# EAGLE board Shield_v1 (EAGLE 7.6.0)
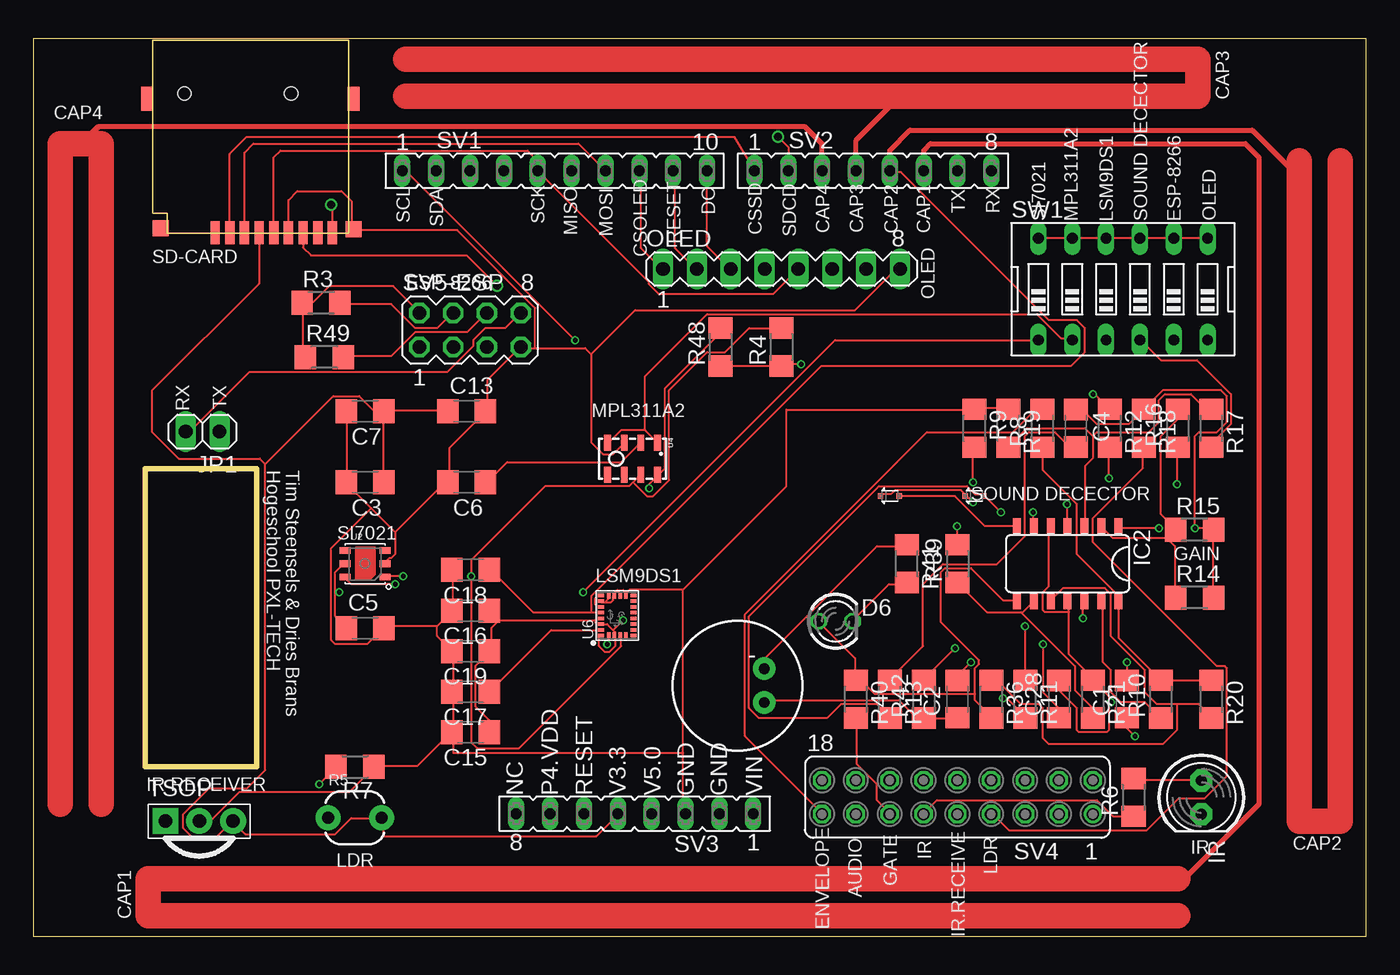
[diagram p0: board, top side]
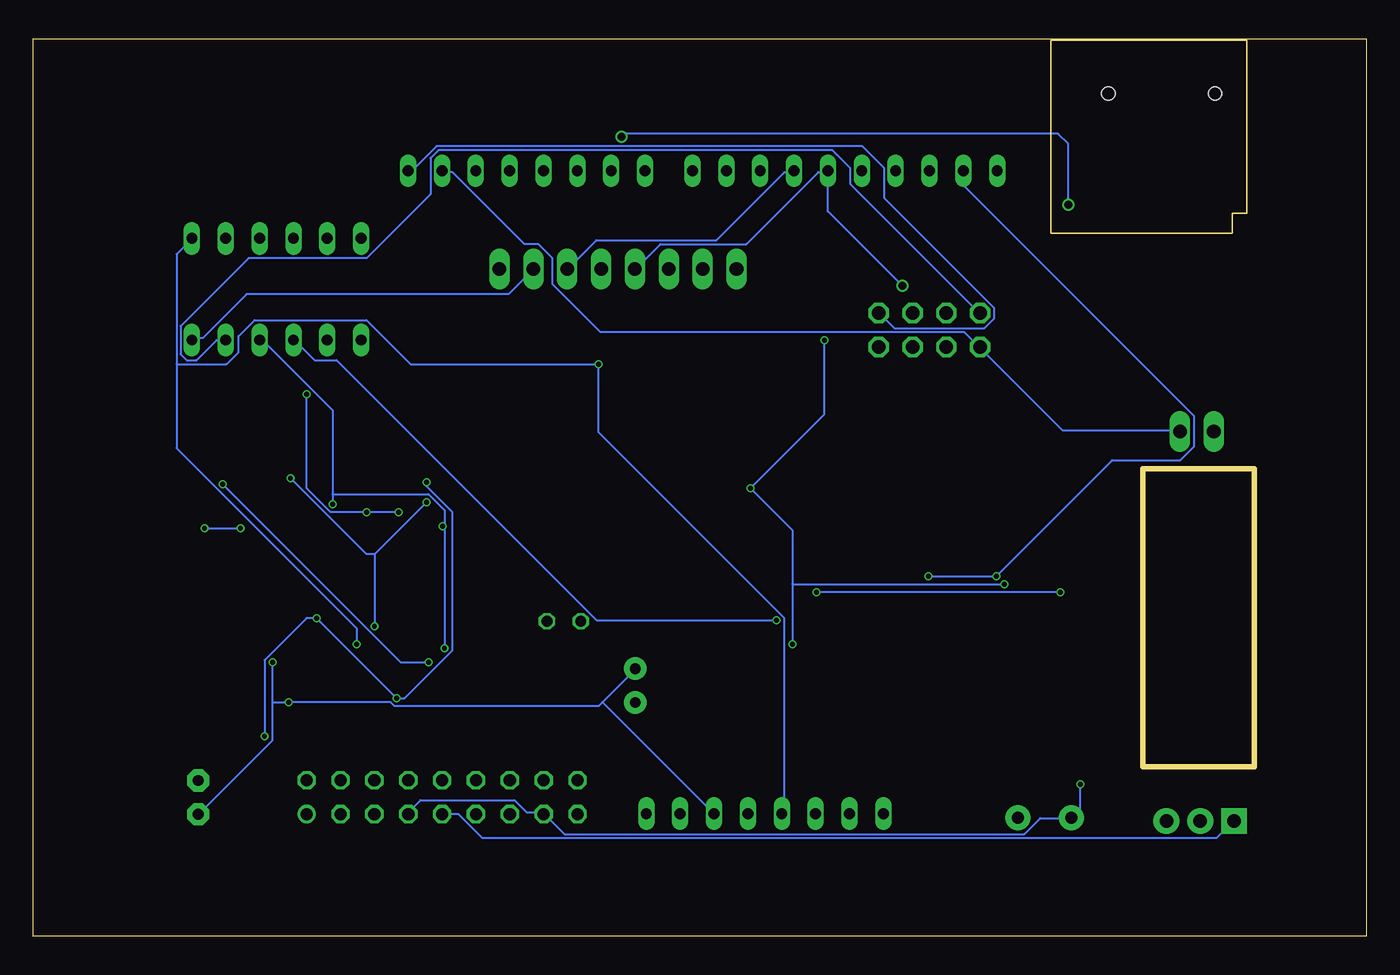
[diagram p1: board, bottom side, seen from below]

Size 100 x 67.3 mm. Coordinates in mm from the lower left corner, seen from the top.
Outline: 0,0 100,0 100,67.3 0,67.3 0,0
Outline: 8.38,35.05 8.38,12.7 16.76,12.7 16.76,35.05 8.38,35.05
Copper layers (1*16): Top 0.018mm / dielectric 1.55mm / Bottom 0.018mm
Design rules "eC_2Layer_PClass6_BaseCopperO18_eCDefault": minimum track width 0.15mm, minimum drill 0.35mm, track to track 0.15mm, track to pad 0.15mm, pad to pad 0.15mm, via to via 0.15mm, smd to smd 0mil, copper to edge 0.25mm, drill to drill 0.35mm, minimum pad ring 0.175mm, minimum via ring 0.125mm, stop-mask expansion 0mil, vias tented up to drill 0.45mm, thermal gap 0.2mm
Net classes: 0 default: clearance 0.205 mm
Holes 1 mm at 11.34,63.21 19.34,63.22

## Footprints (pad centres in the part's own frame; a part is rotated, then mirrored left to right if it is on the bottom)
C1206 = smd 1.6 x 1.8: 1 -1.4,0; 2 1.4,0
SOD-523 = smd 0.4 x 0.4: A -0.7,0; C 0.7,0
LED3MM = drill 0.813 octagon: A -1.27,0; K 1.27,0
SO014 = smd 0.6 x 1.2: 1 -3.175,-2.8; 2 -1.905,-2.8; 3 -0.635,-2.8; 4 0.635,-2.8; 5 1.905,-2.8; 6 3.175,-2.8; 7 4.445,-2.8; 8 4.445,2.8; 9 3.175,2.8; 10 1.905,2.8; 11 0.635,2.8; 12 -0.635,2.8; 13 -1.905,2.8; 14 -3.175,2.8
LED5MM = drill 0.813 pad 1.676 octagon: A -1.27,0; K 1.27,0
1X02 = drill 1.016 long: 1 -1.27,0; 2 1.27,0
MIC-9.7MM = drill 0.8 pad 1.676: 1 -2,1.27; 2 -2,-1.27
MA08-1 = drill 1.016 long: 1 -8.89,0; 2 -6.35,0; 3 -3.81,0; 4 -1.27,0; 5 1.27,0; 6 3.81,0; 7 6.35,0; 8 8.89,0
R1206 = smd 1.6 x 1.803: 1 -1.422,0; 2 1.422,0
PHOTOCELL-KIT = drill 0.9 pad 1.88: 1 -2,0; 2 2,0
FE10 = drill 0.813 long: 1 -11.43,0; 2 -8.89,0; 3 -6.35,0; 4 -3.81,0; 5 -1.27,0; 6 1.27,0; 7 3.81,0; 8 6.35,0; 9 8.89,0; 10 11.43,0
FE08 = drill 0.813 long: 1 -8.89,0; 2 -6.35,0; 3 -3.81,0; 4 -1.27,0; 5 1.27,0; 6 3.81,0; 7 6.35,0; 8 8.89,0
FE09-2 = drill 0.914: 1 -10.16,1.27 | drill 0.914 octagon: 2 -10.16,-1.27; 3 -7.62,1.27; 4 -7.62,-1.27; 5 -5.08,1.27; 6 -5.08,-1.27; 7 -2.54,1.27; 8 -2.54,-1.27; 9 0,1.27; 10 0,-1.27; 11 2.54,1.27; 12 2.54,-1.27; 13 5.08,1.27; 14 5.08,-1.27; 15 7.62,1.27; 16 7.62,-1.27; 17 10.16,1.27; 18 10.16,-1.27
MA04-2 = drill 1.016 octagon: 1 -3.81,-1.27; 2 -3.81,1.27; 3 -1.27,-1.27; 4 -1.27,1.27; 5 1.27,-1.27; 6 1.27,1.27; 7 3.81,-1.27; 8 3.81,1.27
EDG-06 = drill 0.813 long: 1 -6.35,-3.81; 2 -3.81,-3.81; 3 -1.27,-3.81; 4 1.27,-3.81; 5 3.81,-3.81; 6 6.35,-3.81; 7 6.35,3.81; 8 3.81,3.81; 9 1.27,3.81; 10 -1.27,3.81; 11 -3.81,3.81; 12 -6.35,3.81
PNA460XM = drill 1.016 pad 1.93 square: 1 -2.54,0 | drill 1.016 pad 1.93: 2 0,0; 3 2.54,0
SI7021 = smd 0.8 x 0.5: DATA 1.5,-1; GND 1.5,0; NC@3 1.5,1; NC@4 -1.5,1; SCK -1.5,-1; VDD -1.5,0
LGA8 = smd 1.2 x 0.5: 1 -1.2,1.875; 2 -1.2,0.625; 3 -1.2,-0.625; 4 -1.2,-1.875; 5 1.2,-1.875; 6 1.2,-0.625; 7 1.2,0.625; 8 1.2,1.875
LGA24-8X4 = smd 0.27 x 0.45: 1 -1.505,1.225; 6 -1.505,-1.225; 7 -1.075,-1.225; 8 -0.645,-1.225; 9 -0.215,-1.225; 10 0.215,-1.225; 11 0.645,-1.225; 12 1.075,-1.225; 13 1.505,-1.225; 18 1.505,1.225; 19 1.075,1.225; 20 0.645,1.225; 21 0.215,1.225; 22 -0.215,1.225; 23 -0.645,1.225; 24 -1.075,1.225 | smd 0.45 x 0.27: 2 -1.475,0.645; 3 -1.475,0.215; 4 -1.475,-0.215; 5 -1.475,-0.645; 14 1.475,-0.645; 15 1.475,-0.215; 16 1.475,0.215; 17 1.475,0.645
SD_CARD = smd 0.7 x 1.6: 1 -1.7,8.5; 2 -2.8,8.5; 3 -3.9,8.5; 4 -5,8.5; 5 -6.1,8.5; 6 -7.2,8.5; 7 -8.3,8.5; 8 -9.4,8.5; CD -10.5,8.5; P$5 -10.5,8.4; P$6 -9.4,8.4; P$7 -8.3,8.4; P$8 -7.2,8.4; P$9 -6.1,8.4; P$10 -5,8.4; P$11 -3.9,8.4; P$12 -2.8,8.4; P$13 -1.7,8.4 | smd 1.2 x 1.2: G -12.1,8.2; P$1 2.4,8.1 | smd 0.9 x 1.8: P$2 -12.1,-1.6; P$3 3.4,-1.6 | hole 1: 0.6,-2; -7.4,-2

## Placement (x,y rotation side)
C1  10uF  [C1206]  82.04,17.78 90 top
C2  10uF  [C1206]  69.34,17.78 90 top
C3  10uF  [C1206]  24.89,34.04 180 top
C4  1.0uF  [C1206]  78.23,38.1 270 top
C5  0.1uF  [C1206]  24.89,23.11 0 top
C6  0.1uF  [C1206]  32.51,34.04 180 top
C7  0.1uF  [C1206]  24.89,39.37 180 top
C13  1uF  [C1206]  32.51,39.37 0 top
C15  0.1uF  [C1206]  32.81,15.31 180 top
C16  0.1uF  [C1206]  32.8,24.43 180 top
C17  0.1uF  [C1206]  32.81,18.35 180 top
C18  10nF  [C1206]  32.8,27.47 180 top
C19  10uF  [C1206]  32.8,21.39 180 top
C28  1.0uF  [C1206]  76.96,17.78 90 top
D4  RB751  [SOD-523]  70.61,33.02 180 top
D5  RB751  [SOD-523]  64.26,33.02 180 top
D6  RED  [LED3MM]  60.2,23.62 0 top
IC2  LMV324  [SO014]  78.23,27.94 180 top
IR  [LED5MM]  87.63,10.41 270 top
JP1  [1X02]  12.7,37.85 180 top
MIC2  MIC9.7MM  [MIC-9.7MM]  52.83,18.8 180 top
OLED  [MA08-1]  56.13,50.04 0 top
R3  1k  [R1206]  21.59,47.5 0 top
R4  10k  [R1206]  56.13,44.2 90 top
R5  PHOTOCELLPTH-KIT  [PHOTOCELL-KIT]  24.13,8.89 0 top
R6  330  [R1206]  82.55,10.41 90 top
R7  4.7k  [R1206]  24.13,12.7 180 top
R8  100  [R1206]  75.69,38.1 90 top
R9  10K  [R1206]  70.61,38.1 270 top
R10  1K  [R1206]  84.58,17.78 90 top
R11  100  [R1206]  74.42,17.78 270 top
R12  22K  [R1206]  80.77,38.1 270 top
R13  10K  [R1206]  64.26,17.78 270 top
R14  100K  [R1206]  87.12,25.4 0 top
R15  GAIN  [R1206]  87.12,30.48 0 top
R16  1K  [R1206]  85.85,38.1 90 top
R17  10K  [R1206]  88.39,38.1 270 top
R18  100  [R1206]  83.31,38.1 270 top
R19  10K  [R1206]  73.15,38.1 270 top
R20  1K  [R1206]  88.39,17.78 270 top
R21  3.3K  [R1206]  79.5,17.78 270 top
R36  100K  [R1206]  71.88,17.78 270 top
R39  100K  [R1206]  69.34,27.94 90 top
R40  100  [R1206]  61.72,17.78 270 top
R41  2.2K  [R1206]  65.53,27.94 270 top
R42  2.2K  [R1206]  66.8,17.78 90 top
R48  10k  [R1206]  51.56,44.2 90 top
R49  1k  [R1206]  21.84,43.43 0 top
SV1  [FE10]  39.12,57.4 0 top
SV2  [FE08]  62.99,57.4 0 top
SV3  [FE08]  45.12,9.2 180 top
SV4  [FE09-2]  69.33,10.43 180 top
SV5-ESP  [MA04-2]  32.77,45.47 0 top
SW1  [EDG-06]  81.75,48.53 0 top
TSOP  PNA460XM  [PNA460XM]  12.45,8.64 0 top
U2  SI7021  [SI7021]  24.89,27.94 0 top
U4  MPL3115A2LGA8  [LGA8]  44.96,35.81 270 top
U6  LSM9DS1  [LGA24-8X4]  43.81,24.05 90 top
U$1  SDCARD  [SD_CARD]  11.94,61.21 180 top

## Library data of the parts
C1-C7 C13 C15-C19 C28 = rcl
D4 D5 = SparkFun-DiscreteSemi; PROD_ID: DIO-11018
D6 = led
IC2 = SparkFun-AnalogIC; PROD_ID: IC-08227
IR R3 R4 R6-R21 R36 R39-R42 R48 R49 TSOP = adafruit
JP1 = pinhead
MIC2 = SparkFun-Sensors; PROD_ID: COMP-08856
OLED SV5-ESP = con-lstb; OC_FARNELL: unknown; OC_NEWARK: unknown
R5 U4 = SparkFun-Sensors
SV1-SV4 = con-lsta; OC_FARNELL: unknown; OC_NEWARK: unknown
SW1 = special
U2 = SparkFun-Sensors; PROD_ID: IC-13093
U6 = LSM9DS1_temp; PROD_ID: IC-12536
U$1 = ProjectEP

## Nets
3.3V: C3.1 C7.1 C13.1 C28.1 R4.1 R5.2 R48.1 SV3.5 SW1.7 SW1.8 SW1.9 SW1.10 SW1.11 SW1.12 TSOP.3 U$1.4
20: SW1.2 U4.1 U4.4
21: C15.1 C16.1 C19.1 SW1.3 U6.1 U6.3 U6.22 U6.23
23: IC2.4 R17.2 R39.2 R42.2 SW1.4
24: R3.1 R49.1 SV5-ESP.2 SW1.5
AMPENV: IC2.14 R8.1 R10.2 R20.1
AUDIO: R5.1 R7.2 R18.2 SV4.7 SV4.15
C1: C17.1 U6.24
CAP1: SV2.6
CAP2: C18.1 SV2.5 U6.21
CAP3: SV2.4
CAP4: SV2.3
CSOLED: OLED.1 SV1.8
CSSD: SV2.1 U$1.2
DC: OLED.3 SV1.10
ENVELOPE: R8.2 SV4.17
GATE: R40.2 SV4.13
GRND: C1.2 C3.2 C5.2 C6.2 C7.2 C13.2 C15.2 C16.2 C17.2 C18.2 C19.2 C28.2 IC2.5 IC2.11 IR.K MIC2.2 OLED.8 R7.1 R9.1 R19.1 R21.1 R41.1 SV3.3 SV5-ESP.7 TSOP.2 U2.GND U4.3 U6.14 U6.15 U6.16 U6.17 U6.18 U6.19 U6.20 U$1.6 U$1.G
IR_LED: R6.1 SV4.11
IR_REC: SV4.9 TSOP.1
MISO: OLED.4 SV1.6 U$1.7
MOSI: OLED.6 SV1.7 U$1.3
N$: C4.1 IC2.1 R14.2 R15.2 R18.1
N$1: C6.1 U4.2
N$2: IR.A R6.2
N$3: C2.1 MIC2.1 R42.1
N$4: R49.2 SV5-ESP.6
N$6: R3.2 SV5-ESP.4
N$8: C5.1 SW1.1 U2.VDD
N$9: OLED.7 SW1.6
N$14: IC2.3 R17.1 R19.2
N$18: IC2.2 R14.1 R15.1 R16.2
N$19: C2.2 R16.1
N$20: C4.2 R13.1
N$21: D4.A IC2.6 R12.1 R13.2
N$22: D5.A IC2.7
N$23: D4.C D5.C R11.1 R12.2
N$24: C1.1 IC2.12 R9.2 R11.2
N$25: IC2.13 R10.1
N$26: IC2.9 R21.2 R39.1
N$27: IC2.10 R20.2 R36.1
N$28: D6.A IC2.8 R36.2 R40.1
N$29: D6.K R41.2
RST: OLED.2 SV1.9
RX: JP1.2 SV2.8 SV5-ESP.8
SCK: OLED.5 SV1.5 U$1.5
SCL: R48.2 SV1.1 U2.SCK U4.8 U6.2
SDA: R4.2 SV1.2 U2.DATA U4.7 U6.4
SDCD: SV2.2 U$1.CD
TX: JP1.1 SV2.7 SV5-ESP.1

## Tracks (layer width: path | path; a pad name or v marks a point on that pad's centre or on a via)
3.3V  (via drill 0.35)
  Top 0.15: R48.1 51.6,42.75 56.1,42.75 R4.1 56.25,42.9 v57.6,42.9 | C3.1 26.25,34.05 26.25,39.3 C7.1 | C13.1 31.05,39.45 26.4,39.45 C7.1 | 17.4,35.4 22.5,40.5 24.45,40.5 25.5,39.45 26.25,39.45 C7.1 | 17.4,35.4 17.4,12.45 16.05,11.1 13.2,11.1 11.25,9.15 11.25,8.1 12,7.35 13.65,7.35 14.85,8.55 TSOP.3 15,8.55 15.9,7.65 22.65,7.65 23.85,8.85 26.1,8.85 R5.2 26.25,8.75 26.25,7.5 42.25,7.5 43.75,9 SV3.5 | U$1.4 16.94,48.94 8.89,40.89 8.89,37.85 10.92,35.81 16.99,35.81 17.4,35.4 | SW1.12 75.45,52.35 77.85,52.35 SW1.11 78,52.35 80.4,52.35 SW1.10 80.55,52.35 82.95,52.35 SW1.9 83.1,52.35 85.5,52.35 SW1.8 85.65,52.35 88.05,52.35 SW1.7 | v75.75,21.9 75.75,18.3 76.95,17.1 76.95,16.5 C28.1
  Bottom 0.15: v75.75,21.9 75.75,23.1 89.25,36.6 89.25,42.9 | 89.25,42.9 89.25,51.15 88.2,52.2 SW1.7 | 89.25,42.9 85.5,42.9 84.6,43.8 84.6,45 83.4,46.2 75,46.2 71.7,42.9 v57.6,42.9 57.6,37.8 43.65,23.85 43.65,9.45 43.8,9.3 SV3.5
20
  Top 0.15: 45.9,37.95 44.1,37.95 43.2,37.05 U4.4 | 45.9,37.95 46.8,37.05 U4.1 | 45.9,37.95 45.9,42 50.55,46.65 75.3,46.65 77.1,44.85 77.85,44.85 SW1.2
21  (via drill 0.35)
  Top 0.15: 42.15,23.7 42.15,23.55 42.3,23.4 42.45,23.4 U6.23 43.05,23.4 43.5,22.95 | 42.15,23.7 42.3,23.85 42.45,23.85 U6.22 | U6.1 42.45,22.5 42.45,21.75 42.9,21.3 43.2,21.3 43.65,21.75 43.65,22.5 U6.3 43.65,22.65 43.65,22.8 43.5,22.95 | 34.95,23.7 42.15,23.7 | 34.95,23.7 34.35,24.3 C16.1 34.95,23.7 | 34.95,23.7 34.35,23.1 34.35,21.45 C19.1 34.2,21.3 33.15,20.25 33.15,17.25 34.2,16.2 34.2,15.45 C15.1 | v44.25,23.7 43.5,22.95
  Bottom 0.15: v44.25,23.7 57.75,23.7 77.25,43.2 78.9,43.2 80.4,44.7 SW1.3
23  (via drill 0.35)
  Top 0.15: v77.55,32.4 77.55,30.75 IC2.4 | v69.15,21.6 66.9,19.35 R42.2 | v69.3,30.75 69.3,29.4 R39.2 | R17.2 88.5,36.75 88.5,37.05 89.85,38.4 89.85,40.65 87.3,43.2 84.6,43.2 83.1,44.7 SW1.4
  Bottom 0.15: 77.55,33.15 77.55,39.45 82.95,44.85 SW1.4 | 77.55,33.15 v77.55,32.4 | 69.15,30.75 69.15,31.95 70.35,33.15 77.55,33.15 | 69.15,30.75 v69.15,21.6 | 69.15,30.75 v69.3,30.75
24
  Top 0.15: R49.1 20.4,43.5 20.25,43.65 20.25,47.4 R3.1 20.25,47.55 21,47.55 22.2,48.75 27,48.75 28.95,46.8 SV5-ESP.2
  Bottom 0.15: SW1.5 85.65,44.7 86.25,44.7 87.75,43.2 88.5,43.2 88.95,43.65 88.95,45.75 83.85,50.85 75,50.85 70.2,55.65 70.2,58.35 69.6,58.95 40.05,58.95 38.7,57.6 38.7,56.4 29.1,46.8 SV5-ESP.2
AMPENV
  Top 0.15: R20.1 88.35,19.2 84.6,19.2 R10.2 84.45,19.35 81.45,22.35 81.45,25.05 IC2.14 81.3,25.2 81.3,25.65 78.3,28.65 78.3,32.4 75.75,34.95 75.75,36.6 R8.1
AUDIO  (via drill 0.35)
  Top 0.15: v21.45,11.4 22.65,12.6 R7.2 | R18.2 83.25,36.6 83.25,35.1 79.5,31.35 79.5,29.55 88.8,20.25 89.4,20.25 89.55,20.1 89.55,12 87.9,10.35 85.95,10.35 83.55,7.95 73.2,7.95 72,9.15 SV4.7
  Bottom 0.15: v21.45,11.4 21.45,9.6 22.05,9 R5.1 22.2,8.85 24.45,8.85 25.65,7.65 60.15,7.65 61.65,9.15 SV4.15 61.8,9.3 63,9.3 63.9,10.2 70.95,10.2 71.85,9.3 SV4.7
C1
  Top 0.15: U6.24 42.45,22.95 38.85,22.95 34.35,18.45 C17.1
CAP2
  Top 0.15: 41.85,24.3 37.5,24.3 34.35,27.45 C18.1 | 41.85,24.3 42.45,24.3 U6.21 | 41.85,24.3 41.85,25.5 59.1,42.75 77.85,42.75 78.9,43.8 78.9,45.6 78.3,46.2 76.2,46.2 65.1,57.3 64.35,57.3 SV2.5 64.35,57.45
  Top 0.381: SV2.5 64.26,58.93 65.79,60.45 91.44,60.45 94.74,57.15
CAP3
  Top 0.381: SV2.4 61.72,59.69 64.26,62.23
CAP4
  Top 0.381: SV2.3 59.18,59.44 57.91,60.71 4.83,60.71
CSOLED
  Top 0.15: SV1.8 45.6,57.3 45.6,51.6 47.1,50.1 OLED.1
CSSD
  Top 0.15: U$1.2 14.74,58.68 16,59.94 52.58,59.94 SV2.1
DC
  Top 0.15: SV1.10 50.55,57.3 50.55,51.75 52.2,50.1 OLED.3
ENVELOPE
  Top 0.15: R8.2 75.6,39.45 75.15,39.45 73.5,37.8 67.05,37.8 53.4,24.15 53.4,15 59.1,9.3 SV4.17
GATE
  Top 0.15: R40.2 61.8,16.35 61.8,12.9 63.3,11.4 63.3,10.2 64.2,9.3 SV4.13
GRND  (via drill 0.35)
  Top 0.15: 27.15,30.3 27.15,28.65 26.85,28.35 26.7,28.35 26.4,28.05 U2.GND | 25.35,32.1 23.55,33.9 C3.2 23.55,34.05 23.55,39.3 C7.2 | 25.35,32.1 27.15,30.3 | 27.15,30.3 30.75,33.9 31.05,33.9 C6.2 31.2,34.05 31.2,36.6 33.9,39.3 C13.2 34.05,39.45 34.05,41.7 36.45,44.1 SV5-ESP.7 36.6,44.1 37.65,44.1 | 41.85,43.65 41.85,37.05 42.75,36.15 43.5,36.15 44.25,36.9 U4.3 | 41.85,43.65 41.4,44.1 37.65,44.1 | 37.65,44.1 37.65,47.1 31.8,52.95 24.15,52.95 U$1.G 23.88,53.18 23.88,55.12 23.11,55.88 19.81,55.88 19.14,55.21 U$1.6 | 41.85,43.65 45.15,46.95 61.65,46.95 64.65,49.95 64.95,49.95 OLED.8 | 30.3,23.25 26.4,23.25 C5.2 26.25,23.1 25.05,21.9 22.65,21.9 22.35,22.2 22.35,29.1 25.35,32.1 | 30.3,23.25 31.35,24.3 C16.2 31.5,24.45 31.5,27.45 C18.2 | C15.2 31.5,15.45 31.5,18.3 C17.2 31.5,18.45 31.5,21.3 C19.2 31.35,21.45 30.3,22.5 30.3,23.25 | C15.2 31.35,15.3 28.8,12.75 25.65,12.75 R7.1 25.5,12.6 23.7,10.8 15.45,10.8 13.35,8.7 12.45,8.7 TSOP.2 | 77.7,24.3 77.7,21.15 79.5,19.35 R21.1 80.7,18 80.7,17.55 | 77.7,24.3 77.7,25.05 IC2.11 | 77.7,24.3 75.9,24.3 75.75,24.45 75.75,25.8 76.2,26.25 76.2,30.6 IC2.5 | 80.7,17.55 80.7,15.45 80.55,15.3 78.45,15.3 78.3,15.45 78.3,17.1 77.1,18.3 77.1,19.05 C28.2 | v82.05,20.55 82.05,19.2 C1.2 | v80.85,17.55 80.7,17.55 | R41.1 65.4,29.25 63.3,29.25 54.9,20.85 54.9,20.1 MIC2.2 | R19.1 73.05,39.6 70.65,39.6 R9.1 70.5,39.5 56.5,39.5 56.5,33.75 48.75,26 | 43.8,25.95 43.65,25.8 43.65,25.65 U6.16 43.5,25.5 43.5,25.2 43.35,25.05 42.9,25.05 | 43.8,25.95 44.1,25.65 U6.15 | 43.8,25.95 44.25,25.95 44.4,25.8 44.4,25.65 U6.14 44.5,25.75 44.75,26 48.75,26
  Top 0.15: 42.15,24.9 42.3,24.75 42.45,24.75 U6.20 | 42.15,24.9 42.45,25.2 U6.19 42.6,25.05 42.9,25.05 | 42.9,25.05 43.2,25.35 43.2,25.5 U6.17 | 42.15,24.9 42.15,25.35 42.3,25.5 42.45,25.5 U6.18 | 31.5,15.3 C15.2 | 48.75,13.75 48.75,9.25 SV3.3 | 48.75,13.75 48.75,26 | 48.75,13.75 31.5,13.75 31.5,15.25 C15.2
  Bottom 0.15: 82.05,17.55 82.05,14.7 87.6,9.15 IR.K | 82.05,17.55 v82.05,20.55 | 82.05,17.55 v80.85,17.55 73.2,17.55 72.9,17.25 57.6,17.25 57.3,17.55 | 57.3,17.55 54.9,19.95 MIC2.2 | 57.3,17.55 49,9.25 SV3.3
IR_LED
  Top 0.15: R6.1 82.5,9 81,9 79.8,10.2 67.8,10.2 66.9,9.3 SV4.11
IR_REC
  Bottom 0.15: SV4.9 69.3,9.15 68.1,9.15 66.3,7.35 11.25,7.35 10.05,8.55 TSOP.1
MISO  (via drill 0.6)
  Top 0.15: U$1.7 20.24,51.64 20.83,51.05 32.51,51.05 v34.8,48.77
  Bottom 0.15: OLED.4 54.75,50.1 52.95,51.9 46.5,51.9 41.1,57.3 40.5,57.3 SV1.6 40.39,54.36 v34.8,48.77
MOSI
  Top 0.15: U$1.3 15.84,58.76 16.51,59.44 40.89,59.44 SV1.7
  Bottom 0.15: SV1.7 43.05,57.3 43.65,57.3 48.75,52.2 57.75,52.2 59.85,50.1 OLED.6
N$  (via drill 0.35)
  Top 0.15: C4.1 78.3,39.45 78.75,39.45 79.8,38.4 82.2,38.4 83.25,39.45 R18.1 83.4,39.6 84.75,40.95 89.1,40.95 89.55,40.5 89.55,38.55 88.8,37.8 87.45,37.8 87.15,37.5 v87.15,30.6 88.5,30.6 R15.2 88.5,30.45 88.5,25.5 R14.2 | v84.45,30.6 81.45,30.6 IC2.1
  Bottom 0.15: v87.15,30.6 v84.45,30.6
N$1
  Top 0.15: U4.2 45.45,36.9 44.1,35.55 35.55,35.55 34.05,34.05 C6.1
N$2
  Top 0.15: R6.2 82.65,11.7 87.6,11.7 IR.A
N$3
  Top 0.15: C2.1 69.3,16.35 66.9,16.35 R42.1 66.75,16.5 66.15,16.5 64.95,17.7 55.05,17.7 54.9,17.55 MIC2.1
N$4
  Top 0.15: R49.2 23.4,43.5 26.85,43.5 28.65,45.3 32.55,45.3 33.9,46.65 SV5-ESP.6
N$5
  Top 0.406: 3.66,60.08 4.21,60.08 4.82,60.69
N$6
  Top 0.15: R3.2 23.1,47.4 26.85,47.4 28.65,45.6 30.3,45.6 31.35,46.65 SV5-ESP.4
N$7
  Top 0.381: 66.8,58.42 66.8,58.93 67.31,59.44 90.93,59.44 91.95,58.42 91.95,9.91 86.36,4.32
N$8  (via drill 0.35)
  Top 0.15: 22.65,25.8 22.65,24 23.4,23.25 C5.1 | 22.65,25.8 22.65,27.3 23.25,27.9 U2.VDD | v41.25,25.8 60.15,44.7 75.3,44.7 SW1.1 | 22.65,25.8 v22.95,25.8
  Bottom 0.15: v22.95,25.8 v41.25,25.8
N$9
  Bottom 0.15: OLED.7 62.55,49.95 64.35,48.15 84,48.15 87.3,44.85 88.05,44.85 SW1.6
N$14
  Top 0.15: 79.5,37.5 79.5,35.85 78.9,35.25 78.9,30.75 IC2.3 | 79.5,37.5 78.9,38.1 74.55,38.1 73.2,36.75 R19.2 | 79.5,37.5 79.8,37.8 83.7,37.8 84.45,38.55 84.45,40.2 84.9,40.65 86.85,40.65 87.9,39.6 88.35,39.6 R17.1
N$18
  Top 0.15: 85.05,29.85 81,29.85 80.25,30.6 IC2.2 | 85.05,29.85 85.65,30.45 R15.1 | 85.05,29.85 85.65,29.25 85.65,25.5 R14.1 | 85.05,29.85 R15.1 | R16.2 85.8,39.45 85.8,38.7 84.6,37.5 84.6,31.65 85.65,30.6 R15.1
N$19  (via drill 0.35)
  Top 0.15: v70.35,20.55 69.45,19.65 69.45,19.2 C2.2 | v85.8,33.9 85.8,36.6 R16.1
  Bottom 0.15: v70.35,20.55 72.45,20.55 v85.8,33.9
N$20
  Top 0.15: C4.2 78.15,36.75 77.7,36.75 76.65,37.8 74.7,37.8 74.4,37.5 74.4,30 72.3,27.9 68.25,27.9 66.75,26.4 66.75,21.75 64.35,19.35 R13.1
N$21  (via drill 0.35)
  Top 0.15: R13.2 64.2,16.5 63.3,17.4 60.6,17.4 59.55,16.35 54.45,16.35 53.7,17.1 53.7,24 63.45,33.75 70.05,33.75 70.65,33.15 71.25,33.15 D4.A 71.4,33 v72.6,31.8 | v75,31.8 75,30.75 IC2.6 | v79.5,40.65 79.65,40.65 80.7,39.6 R12.1
  Bottom 0.15: v72.6,31.8 v75,31.8 77.7,31.8 79.5,33.6 v79.5,40.65
N$22
  Top 0.15: D5.A 65.1,33 69.15,33 71.4,30.75 73.65,30.75 IC2.7
N$23  (via drill 0.35)
  Top 0.15: D5.C 63.6,33.15 64.35,33.15 64.65,33.45 69.6,33.45 69.9,33.15 D4.C 70.05,33 v70.5,32.55 | v74.4,23.25 74.4,19.35 R11.1 | v80.7,34.35 80.7,36.6 R12.2
  Bottom 0.15: 74.4,28.65 v74.4,23.25 | v70.5,32.55 74.4,28.65 | v80.7,34.35 75,28.65 74.4,28.65
N$24  (via drill 0.35)
  Top 0.15: v78.75,23.85 78.75,25.05 IC2.12 | v72.75,17.85 73.05,17.85 74.4,16.5 R11.2 | v82.65,15 82.05,15.6 82.05,16.35 C1.1 | v70.5,34.05 70.5,36.6 R9.2
  Bottom 0.15: v82.65,15 82.65,20.7 79.5,23.85 v78.75,23.85 v72.75,17.85 72.15,17.85 68.55,21.45 68.55,31.8 70.5,33.75 v70.5,34.05
N$25
  Top 0.15: IC2.13 80.25,25.05 80.25,20.55 80.85,19.95 80.85,18.3 81.6,17.55 83.4,17.55 84.45,16.5 R10.1
N$26
  Top 0.15: 74.1,24.3 71.55,24.3 69.45,26.4 R39.1 | 74.1,24.3 74.25,24.3 75,25.05 IC2.9 | 74.1,24.3 78.15,20.25 78.15,18.45 79.5,17.1 79.5,16.5 R21.2
N$27
  Top 0.15: 85.8,17.4 87.45,17.4 88.35,16.5 R20.2 | 85.8,17.4 84.3,17.4 83.4,18.3 83.4,19.95 80.85,22.5 80.85,25.65 80.4,26.1 77.25,26.1 76.35,25.2 IC2.10 | 85.8,17.4 85.8,15.45 84.75,14.4 76.2,14.4 75.75,14.85 75.75,17.1 75.45,17.4 74.1,17.4 72.3,19.2 72,19.2 R36.1
N$28
  Top 0.15: D6.A 58.95,23.55 61.65,20.85 61.65,19.35 R40.1 61.8,19.2 62.1,19.2 63.15,18.15 70.65,18.15 | 70.65,18.15 70.65,17.7 71.85,16.5 R36.2 | 70.65,18.15 70.65,20.1 70.95,20.4 70.95,20.7 68.1,23.55 68.1,27.3 68.4,27.6 70.35,27.6 72.75,25.2 73.65,25.2 IC2.8
N$29
  Top 0.15: R41.2 65.4,26.4 64.2,26.4 61.5,23.7 D6.K
RST
  Top 0.15: SV1.9 48.15,57.3 48.15,51.6 49.65,50.1 OLED.2
RX
  Top 0.15: JP1.2 11.55,37.95 11.85,37.95 16.2,42.3 31.05,42.3 33,44.25 33,44.7 33.9,45.6 35.4,45.6 36.45,46.65 SV5-ESP.8
  Bottom 0.15: SV2.8 71.85,57.45 71.55,57.45 69.75,59.25 37.8,59.25 36.15,57.6 36.15,55.35 27.9,47.1 27.9,46.35 28.65,45.6 35.4,45.6 36.45,46.65 SV5-ESP.8
S$1
  Top 1.93: 85.85,1.52 8.64,1.52 8.64,4.32 85.85,4.32
S$2
  Top 1.93: 27.94,65.79 87.38,65.79 87.38,62.99 27.94,62.99
S$3
  Top 1.93: 98.04,58.17 98.04,8.64 95,8.64 95,58.17
S$4
  Top 1.93: 2.03,9.91 2.03,59.44 5.08,59.44 5.08,9.91
SCK
  Top 0.15: OLED.5 57.3,49.95 55.5,48.15 46.95,48.15 46.2,48.9 46.2,49.05 SV1.5 37.85,58.17 37.08,58.93 18.54,58.93 18.04,58.42 U$1.5
SCL  (via drill 0.35)
  Top 0.15: v43.05,21.9 43.2,22.05 43.2,22.5 U6.2 | v46.2,33.6 46.2,33.9 46.8,34.5 U4.8 46.95,34.65 47.4,35.1 47.4,41.1 51.45,45.15 51.45,45.6 R48.2 | v27.15,26.4 23.85,26.4 23.4,26.85 U2.SCK | SV1.1 27.75,57.3 28.05,57.3 v40.65,44.7
  Bottom 0.15: 43.05,26.4 43.05,30.45 v46.2,33.6 40.65,39.15 v40.65,44.7 | 43.05,26.4 v43.05,21.9 | 43.05,26.4 v27.15,26.4
SDA  (via drill 0.35)
  Top 0.15: 45,34.05 45.45,34.5 U4.7 | 45,34.05 44.7,33.75 38.4,33.75 32.85,28.2 v32.85,27 32.85,14.55 33.3,14.1 36.45,14.1 44.1,21.75 44.1,22.5 U6.4 | v27.75,27 26.4,27 U2.DATA | 45,34.05 46.05,33 46.5,33 47.7,34.2 47.7,40.95 50.55,43.8 51.9,43.8 53.7,45.6 56.1,45.6 R4.2
  Bottom 0.15: v32.85,27 v27.75,27 19.05,35.7 13.95,35.7 12.9,36.75 12.9,39 30.15,56.25 30.15,57.3 SV1.2
SDCD  (via drill 0.6)
  Top 0.15: U$1.CD 22.44,54.78 v22.35,54.86 | v55.88,59.94 56.64,59.18 SV2.2
  Bottom 0.15: v22.35,54.86 22.35,59.44 23.11,60.2 55.63,60.2 v55.88,59.94
TX
  Bottom 0.15: SV2.7 69.3,57.3 68.55,57.3 63.15,51.9 62.1,51.9 61.05,50.85 61.05,48.9 57.45,45.3 30.15,45.3 29.1,44.25 SV5-ESP.1 28.95,44.1 22.8,37.95 14.1,37.95 JP1.1

## Text on the board
tPlace: CAP3 | CAP4 | SCL | DC | TX | RX | SI7021 | MPL311A2 | LSM9DS1 | SOUND DECECTOR | ESP-8266 | OLED | SDA | SCK | MISO | CSSD | CAP4 | CAP3 | CAP2 | CAP1 | MOSI | RESET | SDCD | OLED | CSOLED | SD-CARD | ESP-8266 | ESP-8266 | TX | RX | MPL311A2 | Hogeschool PXL-TECH | Tim Steensels & Dries Brans | SOUND DECECTOR | SI7021 | GAIN | LSM9DS1 | IR RECEIVER | NC | P4.VDD | RESET | V3.3 | V5.0 | GND | GND | VIN | CAP2 | IR | IR | LDR | LDR | GATE | AUDIO | CAP1 | ENVELOPE | IR.RECEIVE